# Altium PCB PCB_alarm_tone.PcbDoc
Units mil, origin at the board's own origin, x right, y up, seen from the top; angles counter-clockwise.
Board outline 2010 x 2450 mil, 2 copper layers (Top Layer, Bottom Layer); 17 components, 17 nets, 73 pads, 0 vias.
Unrouted connection lines stored in the file: 2.
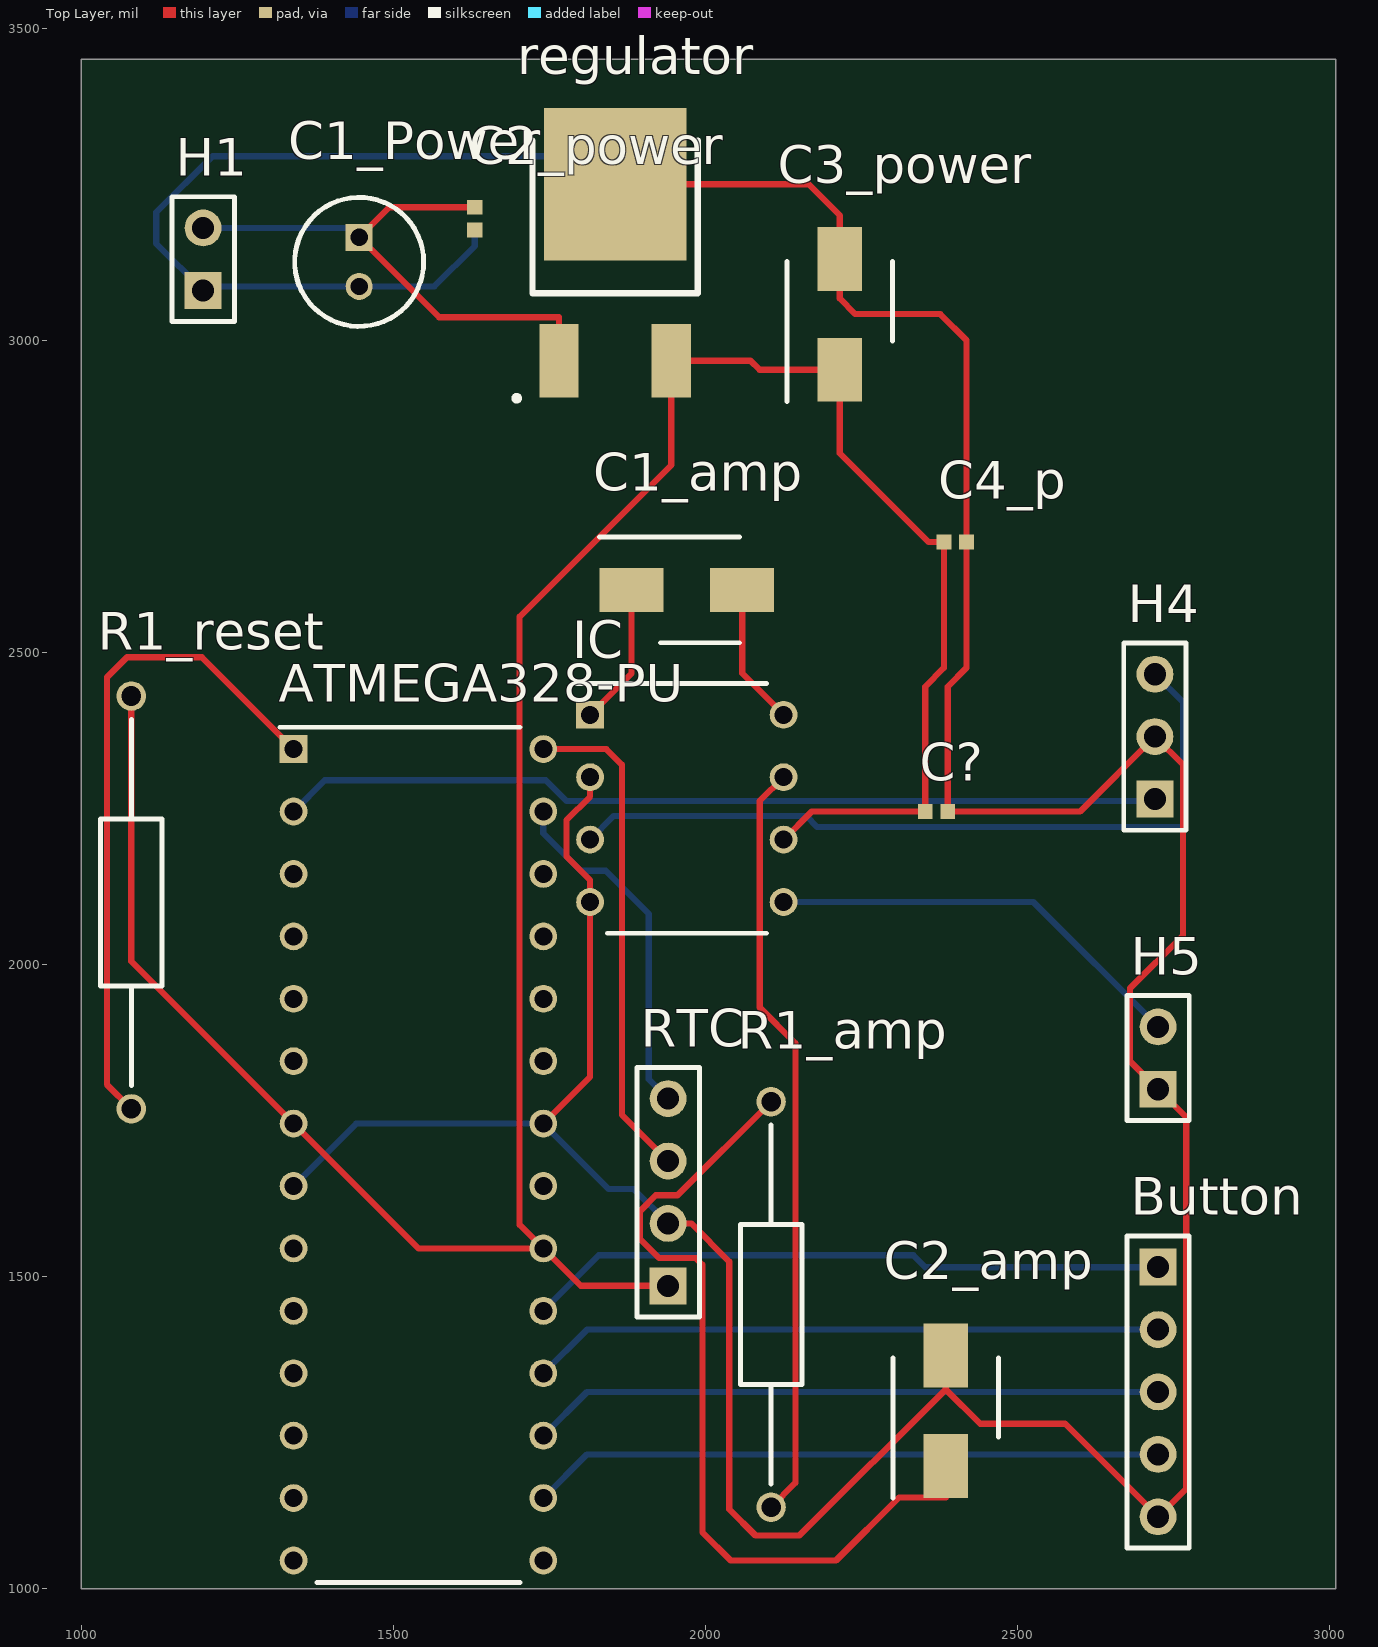
[diagram p0: Top Layer view]
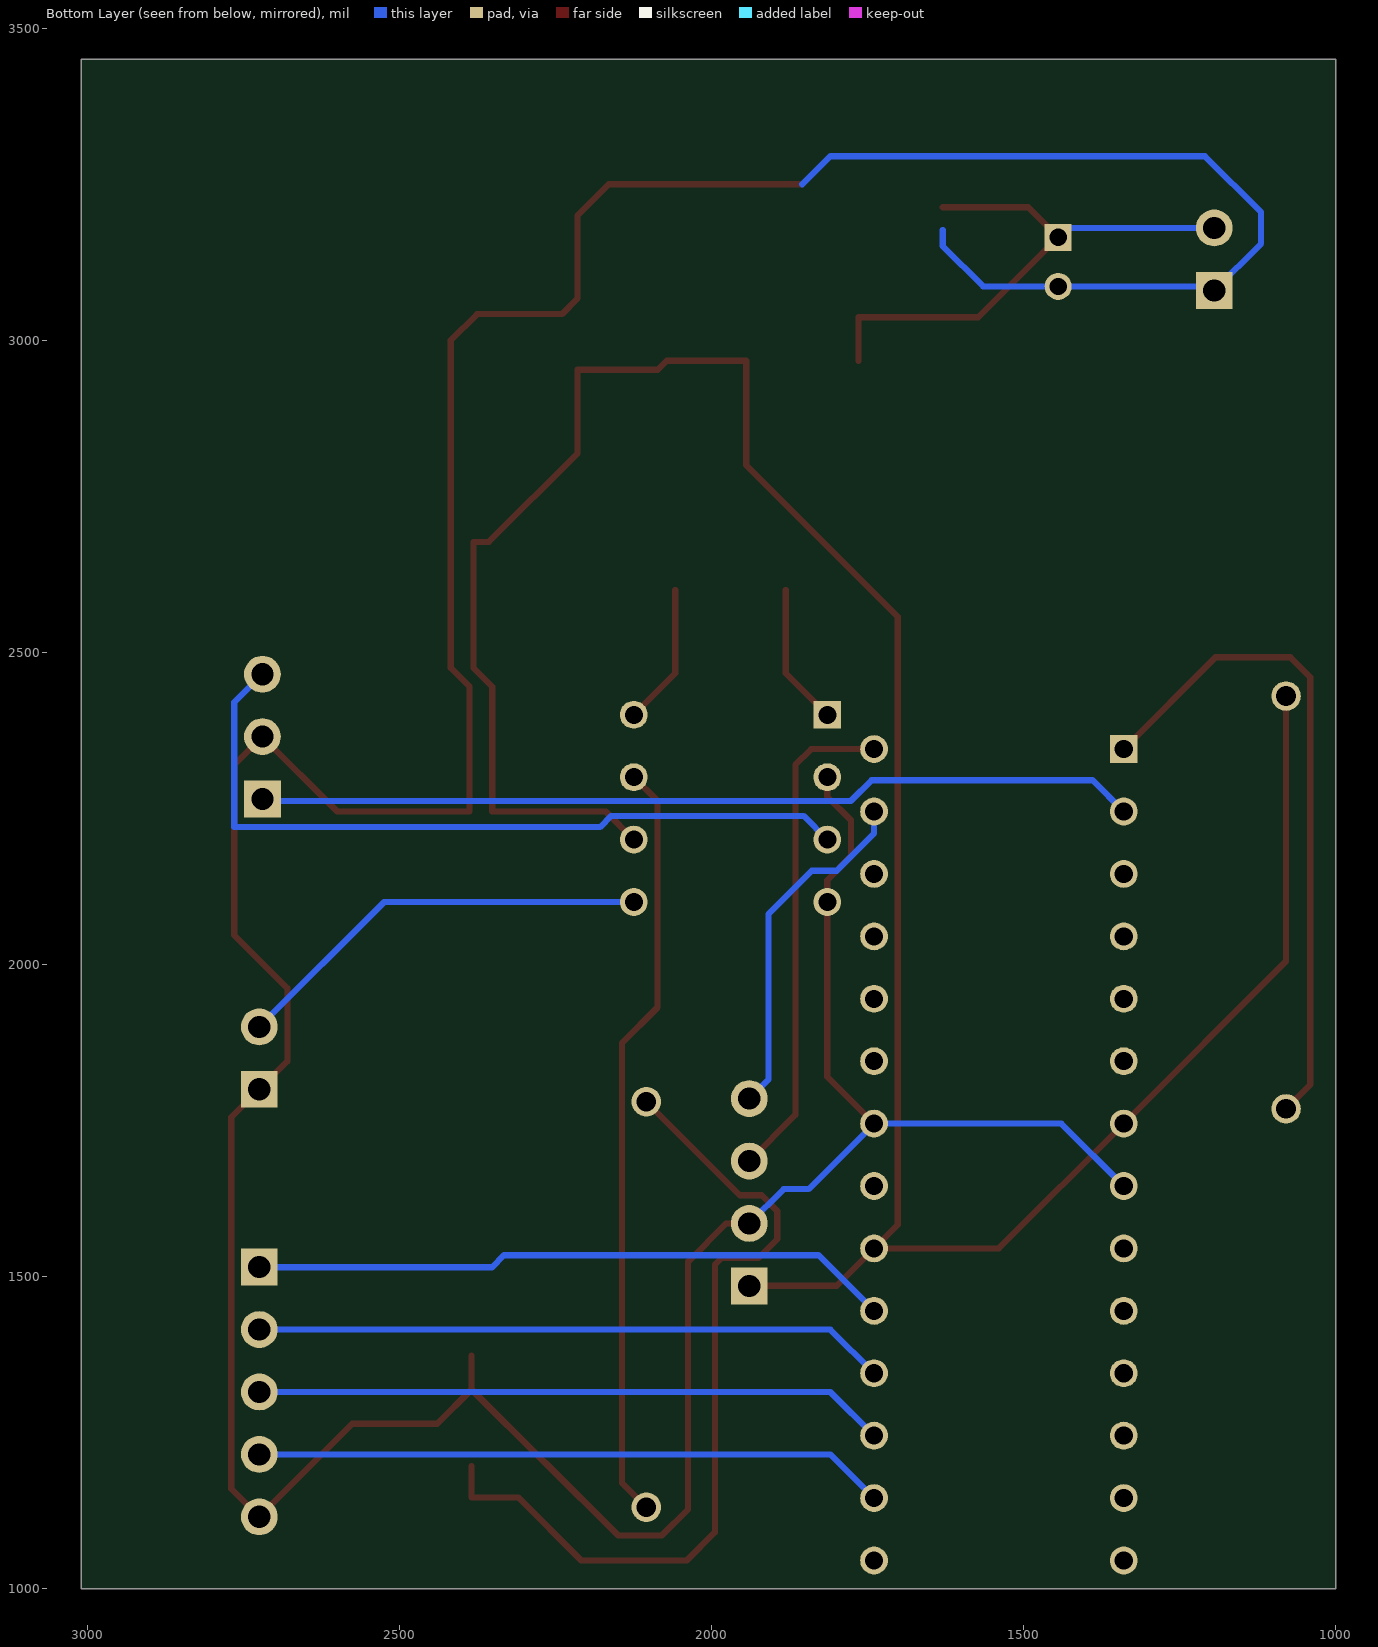
[diagram p1: Bottom Layer view, seen from below]
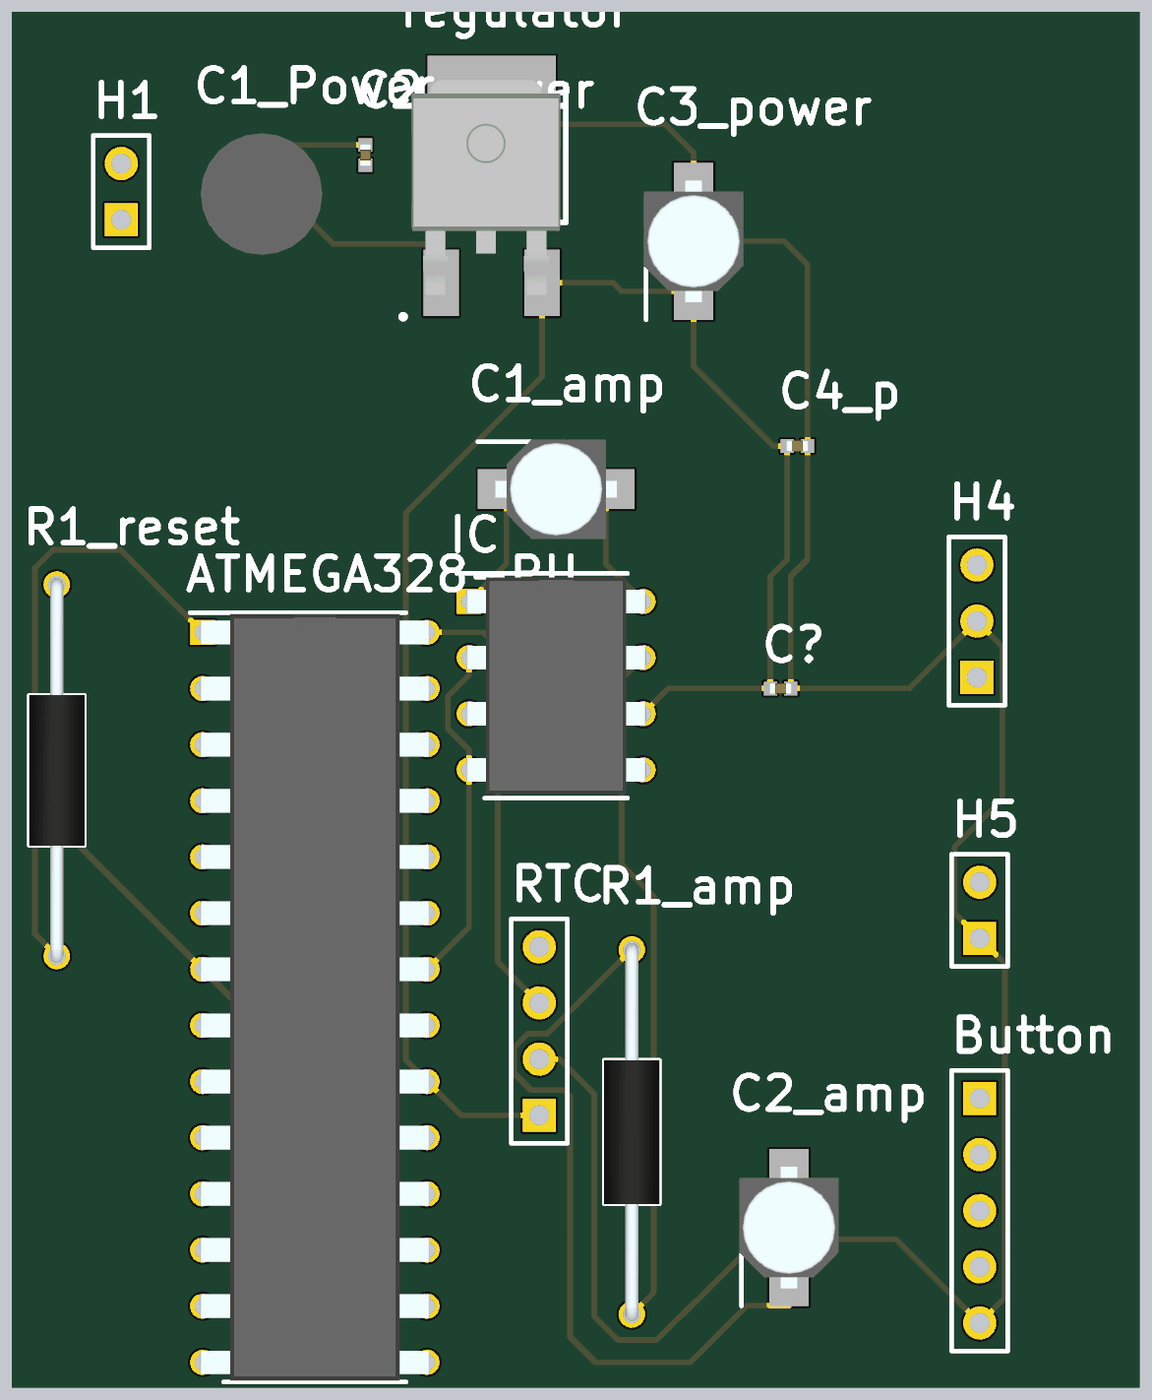
[diagram p2: 3D render of the assembled board from above, using the file's embedded part models]

## Layer stack, top to bottom
Top Solder: solder mask 0.4, Solder Resist, Dk 3.5
Top Layer: signal copper 1.4
Dielectric 1: dielectric 12.6, FR-4, Dk 4.8
Bottom Layer: signal copper 1.4
Bottom Solder: solder mask 0.4, Solder Resist, Dk 3.5

## Board outline
1000,1000 3010,1000 3010,3450 1000,3450

## Design rules (kind name [scope] priority, off if disabled: settings)
Clearance [All] p1: gap=10 ignorepadtopadclearanceinfootprint=FALSE except(0: Arc-Hole Track-Hole SMDPad-Hole THPad-Hole Via-Hole Fill-Hole Poly-Hole Region-Hole Text-Hole)
PolygonConnect [All] p1: connectstyle=Relief reliefconductorwidth=10 reliefentries=4 polygonreliefangle="90 Angle" airgapwidth=10
RoutingVias [All] p1: holewidth=28 width=50 viastyle="Through Hole" minholewidth=28 minwidth=50 maxholewidth=28 maxwidth=50
SolderMaskExpansion [All] p1: expansion=4 istentingtop=FALSE
Width [All] p1: maxlimit=10 minlimit=10 preferedwidth=10
30 further rules are at their usual default settings.

## Components (designator, comment, footprint, x,y, rotation, side; value= is the part's Value field where it differs from the comment)
ATMEGA328-PU "ATMEGA328-PU" DIP1016W53P254L3468H457Q28N 1540,1695 r0 top
Button "Header 5" HDR1X5 2725,1515 r270 top
C1_amp "10uF" CAPAE430X610N 1970,2600 r0 top
C1_Power "0.22u" CAPPRD200W50D525H1250 1445,3165 r270 top
C2_amp "10uF" CAPAE430X610N 2385,1285 r90 top
C2_power "0.1u" CAPC1005X55N 1630,3195 r270 top
C3_power "10uF" CAPAE430X610N 2215,3041.42 r90 top
C4_p "0.1u" CAPC1005X55N 2400,2676.89 r0 top
C? "0.1u" CAPC1005X55N 2370,2245 r0 top
H1 "DC IN" HDR1X2 1195,3080 r90 top
H4 "Vol Controller" HDR1X3 2720,2265 r90 top
H5 "S Out" HDR1X2 2725,1800 r90 top
IC "LM386N" DIP787W53P254L982H508Q8N 1970,2250 r0 top
R1_amp "10K" RESAD1650W60L650D250 2105,1130.39 r90 top
R1_reset "1K" RESAD1680W59L680D250 1080,1768.58 r90 top
regulator "7805" NCV7805BDTRKG_1 1987.48,3075.2 r270 top
RTC "Header 4" HDR1X4 1940,1485 r90 top

## Footprints (in the part's own frame and the unit in brackets; to place one, negate y for a bottom-side part, rotate by r counter-clockwise, add the part's x,y. Pads: shape width x height; smd on the part's side, far side on the other; paste and mask are expansions set on the pad)
CAPAE430X610N [mm]
  rect 2.6x1.8 smd: 1(-2.25,0) 2(2.25,0)
  silkscreen extent -3.55,-2.15 2.15,2.15, body extent -2.75,-2.25 2.75,2.25, height 6.1
CAPC1005X55N [mm]
  rect 0.6x0.62 smd: 1(-0.46,0) 2(0.46,0)
  body extent -0.5,-0.25 0.5,0.25, height 0.55
CAPPRD200W50D525H1250 [mm]
  rect 1.1x1.1 hole 0.7: 1(0,0)
  round 1.1 hole 0.7: 2(2,0)
  silkscreen extent -1.62,-2.62 3.62,2.63, body extent -1.75,-2.75 3.75,2.75, height 12.5
DIP787W53P254L982H508Q8N [mil]
  rect 44.61x44.61 hole 28.86: 1(-155,150)
  round 44.61 hole 28.86: 2(-155,50) 3(-155,-50) 4(-155,-150) 5(155,-150) 6(155,-50) 7(155,50) 8(155,150)
  silkscreen extent -177,-200 127,200, body extent -160,-193 160,193, height 200
DIP1016W53P254L3468H457Q28N [mil]
  rect 44.61x44.61 hole 28.86: 1(-200,650)
  round 44.61 hole 28.86: 2(-200,550) 3(-200,450) 4(-200,350) 5(-200,250) 6(-200,150) 7(-200,50) 8(-200,-50) 9(-200,-150) 10(-200,-250) 11(-200,-350) 12(-200,-450) 13(-200,-550) 14(-200,-650) 15(200,-650) 16(200,-550) 17(200,-450) 18(200,-350) 19(200,-250) 20(200,-150) 21(200,-50) 22(200,50) 23(200,150) 24(200,250) 25(200,350) 26(200,450) 27(200,550) 28(200,650)
  silkscreen extent -222,-685 163,685, body extent -205,-683 205,683, height 180
HDR1X2 [mm] "Connector; Header; 2 Position"
  rect 1.5x1.5 hole 0.9: 1(0,0)
  round 1.5 hole 0.9: 2(2.54,0)
  silkscreen extent -1.27,-1.27 3.81,1.27
HDR1X3 [mm] "Connector; Header; 3 Position"
  rect 1.5x1.5 hole 0.9: 1(0,0)
  round 1.5 hole 0.9: 2(2.54,0) 3(5.08,0)
  silkscreen extent -1.27,-1.27 6.35,1.27
HDR1X4 [mm] "Connector; Header; 4 Position"
  rect 1.5x1.5 hole 0.9: 1(0,0)
  round 1.5 hole 0.9: 2(2.54,0) 3(5.08,0) 4(7.62,0)
  silkscreen extent -1.27,-1.27 8.89,1.27
HDR1X5 [mm] "Connector; Header; 5 Position"
  rect 1.5x1.5 hole 0.9: 1(0,0)
  round 1.5 hole 0.9: 2(2.54,0) 3(5.08,0) 4(7.62,0) 5(10.16,0)
  silkscreen extent -1.27,-1.27 11.43,1.27
NCV7805BDTRKG_1 [mm]
  rect 3x1.6 smd: 1(2.74,-5.65) 2(2.74,-1.08)
  rect 6.2x5.8 smd: 3(-4.44,-3.365)
  silkscreen extent -6.22,-7.46 4.36,0, body extent -6.43,-6.99 3.29,-0.26, height 2.51
RESAD1650W60L650D250 [mm]
  round 1.2 hole 0.8: 1(0,0) 2(16.5,0)
  silkscreen extent 0.95,-1.25 15.55,1.25, body extent -0.3,-1.25 16.8,1.25, height 2.49
RESAD1680W59L680D250 [mm]
  round 1.2 hole 0.8: 1(0,0) 2(16.8,0)
  silkscreen extent 0.95,-1.25 15.85,1.25, body extent -0.29,-1.25 17.1,1.25, height 2.49

## Part data
ATMEGA328-PU: "Integrated Circuit", Manufacturer_Name=Microchip, Mouser Part Number=556-ATMEGA328-PU, Arrow Part Number=ATMEGA328-PU, Arrow Price/Stock=https://www.arrow.com/en/products/atmega328-pu/microchip-technology?region=europe, Datasheet Link=https://componentsearchengine.com/Datasheets/1/ATMEGA328-PU.pdf, Height=4.572mm, Manufacturer_Part_Number=ATMEGA328-PU, Mouser Price/Stock=https://www.mouser.co.uk/ProductDetail/Microchip-Technology-Atmel/ATMEGA328-PU?qs=lwdSMh1%2FoYJT8tfItQpQtA%3D%3D
Button: "Header, 5-Pin", LatestRevisionDate=17-Jul-2002, LatestRevisionNote="Re-released for DXP Platform.", Publisher="Altium Limited"
C1_amp C2_amp C3_power: library part EEE-FK1V100UR, "Capacitor", Manufacturer_Name=Panasonic, Mouser Part Number=667-EEE-FK1V100UR, Arrow Part Number=EEE-FK1V100UR, Arrow Price/Stock=https://www.arrow.com/en/products/eeefk1v100ur/panasonic, Datasheet Link=https://componentsearchengine.com/Datasheets/2/EEEFK1V100UR.pdf, Height=6.1mm, Manufacturer_Part_Number=EEE-FK1V100UR, Mouser Price/Stock=https://www.mouser.co.uk/ProductDetail/Panasonic/EEE-FK1V100UR?qs=qE6bgDGEOCsJL7HSGgjMFA%3D%3D
C1_Power: library part UVR2AR22MDD1TD, "Capacitor Polarised", Manufacturer_Name=Nichicon, Mouser Part Number=647-UVR2AR22MDD1TD, Datasheet Link=http://nichicon-us.com/english/products/pdfs/e-uvr.pdf, Height=12.5mm, Manufacturer_Part_Number=UVR2AR22MDD1TD, Mouser Price/Stock=https://www.mouser.com/Search/Refine.aspx?Keyword=647-UVR2AR22MDD1TD
C2_power C4_p C?: library part GRM155R71C104KA88D, "Capacitor", Manufacturer_Name="Murata Electronics", Mouser Part Number=N/A, Arrow Part Number=GRM155R71C104KA88D, Arrow Price/Stock=https://www.arrow.com/en/products/grm155r71c104ka88d/murata-manufacturing, Datasheet Link=http://www.murata.com/~/media/webrenewal/support/library/catalog/products/capacitor/mlcc/c02e.pdf, Height=0.55mm, Manufacturer_Part_Number=GRM155R71C104KA88D
H1 H5: library part "Header 2", "Header, 2-Pin", LatestRevisionDate=17-Jul-2002, LatestRevisionNote="Re-released for DXP Platform.", Publisher="Altium Limited"
H4: library part "Header 3", "Header, 3-Pin", LatestRevisionDate=17-Jul-2002, LatestRevisionNote="Re-released for DXP Platform.", Publisher="Altium Limited"
IC: library part LM386N-4, "Integrated Circuit", Manufacturer_Name="Texas Instruments", Mouser Part Number=926-LM386N-4, Arrow Part Number=LM386N-4, Arrow Price/Stock=https://www.arrow.com/en/products/lm386n-4/texas-instruments, Datasheet Link=https://datasheet.datasheetarchive.com/originals/dk/DKDS-22/438053.pdf, Height=5.08mm, Manufacturer_Part_Number=LM386N-4, Mouser Price/Stock=https://www.mouser.com/Search/Refine.aspx?Keyword=926-LM386N-4
R1_amp: library part MRS25000C1002FRP00, "Resistor", Manufacturer_Name=Vishay, Mouser Part Number=594-MRS2510K00F, Arrow Part Number=MRS25000C1002FRP00, Arrow Price/Stock=https://www.arrow.com/en/products/mrs25000c1002frp00/vishay?region=nac, Datasheet Link=http://www.vishay.com/docs/28724/mrs16m25.pdf, Manufacturer_Part_Number=MRS25000C1002FRP00, Mouser Price/Stock=https://www.mouser.co.uk/ProductDetail/Vishay-BC-Components/MRS25000C1002FRP00?qs=BLrwpM7T1TlvU75Y03Sdyg%3D%3D
R1_reset: library part MF25_1K2, "Resistor", Manufacturer_Name=MULTICOMP, Manufacturer_Part_Number="MF25 1K2", Datasheet Link="https://componentsearchengine.com/Datasheets/2/MF25 1K2.pdf"
regulator: library part NCV7805BDTRKG, "Integrated Circuit", Manufacturer_Name="ON Semiconductor", Mouser Part Number=863-NCV7805BDTRKG, Arrow Part Number=NCV7805BDTRKG, Arrow Price/Stock=https://www.arrow.com/en/products/ncv7805bdtrkg/on-semiconductor, Datasheet Link=http://www.onsemi.com/pub_link/Collateral/MC7800-D.PDF, Manufacturer_Part_Number=NCV7805BDTRKG, Mouser Price/Stock=https://www.mouser.co.uk/ProductDetail/ON-Semiconductor/NCV7805BDTRKG?qs=Jh7l0IbPjidfcX%252BTiDInNg%3D%3D
RTC: "Header, 4-Pin", LatestRevisionDate=17-Jul-2002, LatestRevisionNote="Re-released for DXP Platform.", Publisher="Altium Limited"

## Nets (pads, with @x,y where several pads share a name; then routed paths per layer and width w, separated by ;. In a path a pad name is that pad's centre, name@x,y a point inside that pad or via, vN(x,y) a via of type N, cw(c..) or ccw(c..) an arc to the next point about the centre after c; other vN are vias at no path point)
+5: ATMEGA328-PU.7 ATMEGA328-PU.20 C3_power.1 C4_p.1 C?.1 IC.6 R1_reset.2 regulator.2 RTC.1 | length 4364.6
  Top Layer w10: R1_reset.2 1080,2005 ATMEGA328-PU.7 1540,1545 ATMEGA328-PU.20 ; RTC.1 1800,1485 ATMEGA328-PU.20 ; IC.6 2170,2245 C?.1 2351.89,2445 2381.89,2475 C4_p.1 2357.11,2676.89 2215,2819 C3_power.1 2086.49,2952.84 2072,2967.32 regulator.2 1944.96,2800 1702,2557.04 1702,1583 ATMEGA328-PU.20
GND: ATMEGA328-PU.8 ATMEGA328-PU.22 Button.5 C1_Power.2 C2_amp.2 C2_power.2 C3_power.2 C4_p.2 C?.2 H1.1 H4.2 H5.1 IC.2 IC.4 regulator.3 RTC.2 | length 7476.3
  Top Layer w10: ATMEGA328-PU.22 1815,1820 IC.4 1815,2135 1777,2173 1777,2231 1815,2269 IC.2 ; regulator.3 2165,3250 2215,3200 C3_power.2 2215,3067 2240,3042 2376.11,3042 2418.11,3000 C4_p.2 2418.11,2475 2388.11,2445 C?.2 2600,2245 H4.2 2765,2320 2765,2047 2680,1962 2680,1845 H5.1 2770,1755 2770,1160 Button.5 2576,1264 2440,1264 2385,1319 ; RTC.2 1976.89,1585 2038,1523.89 2038,1127 2080,1085 2150,1085 2385,1319 ; C2_amp.2 2385,1319
  Bottom Layer w10: ATMEGA328-PU.8 1440,1745 ATMEGA328-PU.22 1845,1640 1885,1640 RTC.2 ; 1630,3176.89 1630,3150.86 1565.4,3086.26 C1_Power.2 1201.26,3086.26 H1.1 1120,3155 1120,3205 1210,3295 1810,3295 1855,3250
NetATMEGA328-PU_1: ATMEGA328-PU.1 R1_reset.1 | length 1080.7
  Top Layer w10: R1_reset.1 1041,1807.58 1041,2460 1073,2492 1193,2492 ATMEGA328-PU.1
NetATMEGA328-PU_16: ATMEGA328-PU.16 Button.4 | length 1014
  Bottom Layer w10: ATMEGA328-PU.16 1810,1215 Button.4
NetATMEGA328-PU_17: ATMEGA328-PU.17 Button.3 | length 1014
  Bottom Layer w10: ATMEGA328-PU.17 1810,1315 Button.3
NetATMEGA328-PU_18: ATMEGA328-PU.18 Button.2 | length 1014
  Bottom Layer w10: ATMEGA328-PU.18 1810,1415 Button.2
NetATMEGA328-PU_19: ATMEGA328-PU.19 Button.1 | length 1029.7
  Bottom Layer w10: ATMEGA328-PU.19 1829,1534 2333,1534 2352,1515 Button.1
NetATMEGA328-PU_27: ATMEGA328-PU.27 RTC.4 | length 566.3
  Bottom Layer w10: ATMEGA328-PU.27 1740,2210 1800,2150 1840,2150 1909,2081 1909,1816 RTC.4
NetATMEGA328-PU_28: ATMEGA328-PU.28 RTC.3 | length 802
  Top Layer w10: ATMEGA328-PU.28 1841,2345 1866,2320 1866,1759 RTC.3
NetC1_amp_1: C1_amp.1 IC.1 | length 227.5
  Top Layer w10: IC.1 1881.42,2466.42 C1_amp.1
NetC1_amp_2: C1_amp.2 IC.8 | length 227.5
  Top Layer w10: C1_amp.2 2058.58,2466.42 IC.8
NetC1_Power_1: C1_Power.1 C2_power.1 H1.2 regulator.1 | length 903.9
  Top Layer w10: C2_power.1 1493.11,3213.11 C1_Power.1 1573,3037 1765.04,3037 regulator.1
  Bottom Layer w10: H1.2 1430,3180 C1_Power.1
NetC2_amp_1: C2_amp.1 R1_amp.2 | length 1374.4
  Top Layer w10: R1_amp.2 1955,1630 1920,1630 1895,1605 1895,1560 1925.47,1529.53 1984.53,1529.53 1995,1519.06 1995,1090 2040,1045 2209,1045 2310,1146 2385,1146 C2_amp.1
NetH4_3: H4.3 IC.3 | length 1236.8
  Bottom Layer w10: IC.3 1853,2238 2161,2238 2179,2220 2765,2220 2765,2420 H4.3
NetH5_2: H5.2 IC.5 | length 682.8
  Bottom Layer w10: IC.5 2525,2100 H5.2
NetIC_7: IC.7 R1_amp.1 | length 1225.1
  Top Layer w10: R1_amp.1 2144,1169.39 2144,1874 2087,1931 2087,2262 IC.7
Speaker: ATMEGA328-PU.2 H4.1 | length 1417.4
  Bottom Layer w10: ATMEGA328-PU.2 1390,2295 1744,2295 1777,2262 2720,2262 H4.1
pads on no net: ATMEGA328-PU.3 ATMEGA328-PU.4 ATMEGA328-PU.5 ATMEGA328-PU.6 ATMEGA328-PU.9 ATMEGA328-PU.10 ATMEGA328-PU.11 ATMEGA328-PU.12 ATMEGA328-PU.13 ATMEGA328-PU.14 ATMEGA328-PU.15 ATMEGA328-PU.21 ATMEGA328-PU.23 ATMEGA328-PU.24 ATMEGA328-PU.25 ATMEGA328-PU.26